# EAGLE board openSX70-dongle. (EAGLE 8.4.3)
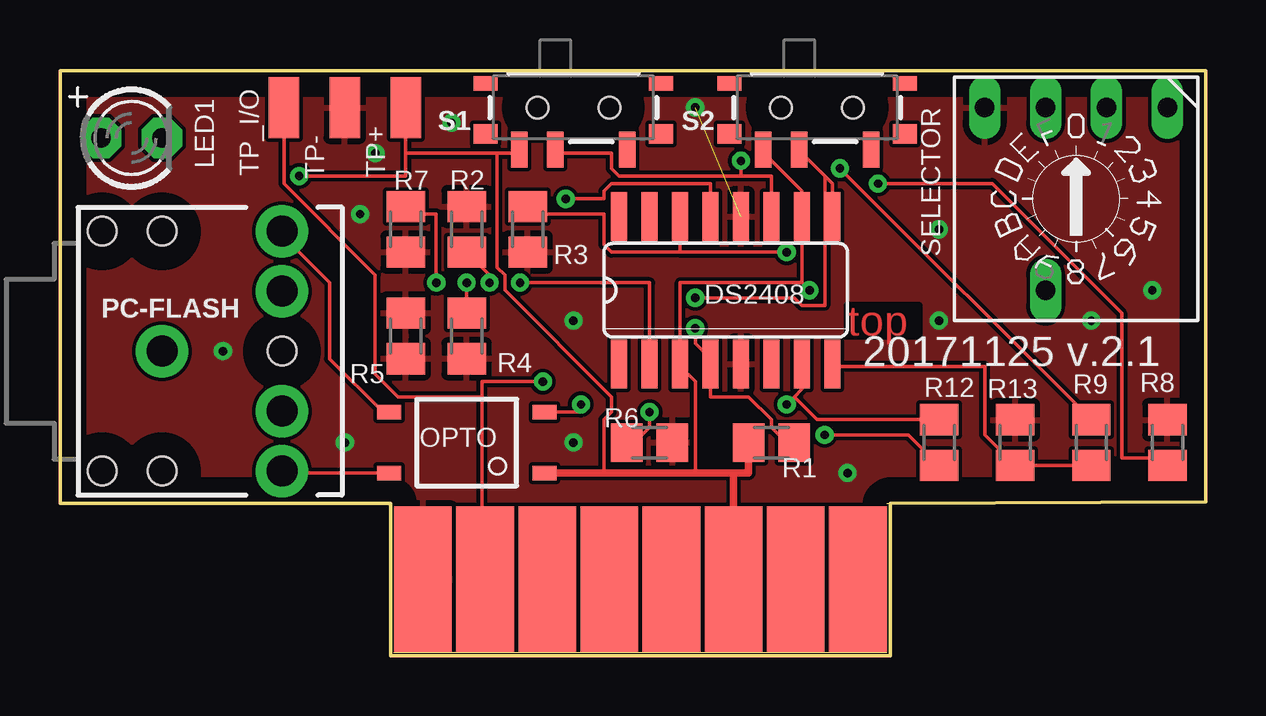
[diagram p0: board, top side]
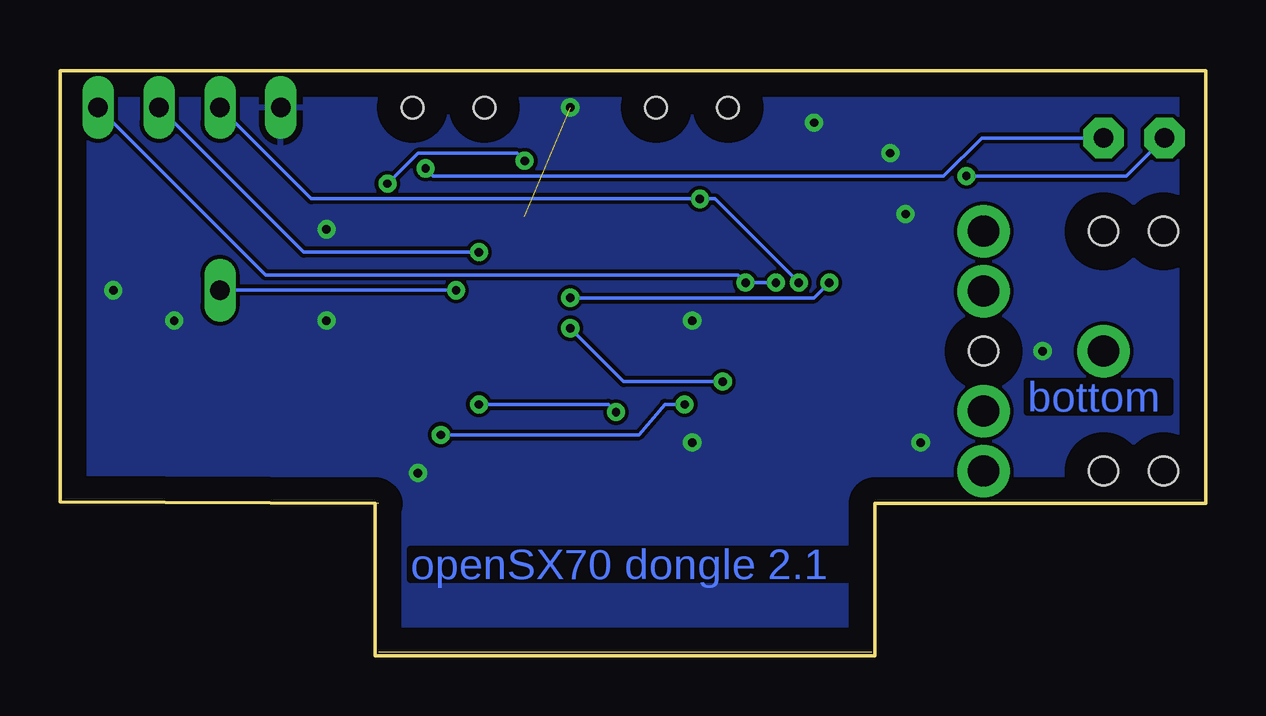
[diagram p1: board, bottom side, seen from below]

Size 47.75 x 24.38 mm. Coordinates in mm from the lower left corner, seen from the top.
Outline: 13.9,0.14 34.48,0.14
Outline: 34.48,6.35 34.61,6.35
Outline: 34.61,6.35 34.61,0 13.78,0 13.78,6.35 0,6.35 0,24.38 47.75,24.38 47.75,6.41 34.61,6.35
Copper layers (1*16): Top 0.035mm / dielectric 1.5mm / Bottom 0.035mm
Design rules "default": minimum track width 6mil, minimum drill 0.35mm, track to track 6mil, track to pad 6mil, pad to pad 6mil, via to via 6mil, smd to smd 6mil, copper to edge 40mil, drill to drill 6mil, minimum pad ring 10mil, minimum via ring 8mil, stop-mask expansion 4mil, vias tented up to drill 0mil, thermal gap 10mil

## Footprints (pad centres in the part's own frame; a part is rotated, then mirrored left to right if it is on the bottom)
SO16 = smd 0.66 x 2.032: 1 -4.445,-3.073; 2 -3.175,-3.073; 3 -1.905,-3.073; 4 -0.635,-3.073; 5 0.635,-3.073; 6 1.905,-3.073; 7 3.175,-3.073; 8 4.445,-3.073; 9 4.445,3.073; 10 3.175,3.073; 11 1.905,3.073; 12 0.635,3.073; 13 -0.635,3.073; 14 -1.905,3.073; 15 -3.175,3.073; 16 -4.445,3.073
LED3MM = drill 0.813 pad 1.676 octagon: A -1.27,0; K 1.27,0
SO-4 = smd 1 x 0.6: 1 -3.24,0.635; 2 -3.24,-1.905; 3 3.24,-1.905; 4 3.24,0.635
AUDIO-JACK = drill 1.3 pad 2.184: RING 5,5; RSH 5,2.5; SLEEVE 0,0; TIP 5,-5; TSH 5,-2.5 | hole 1.2: 0,5; -2.5,5; -2.5,-5; 0,-5; 5,0
M0805 = smd 1.3 x 1.6: 1 -0.95,0; 2 0.95,0
SWITCH_SPST_SMD_A = smd 0.7 x 1.5: 1 -2.25,-1.75; 2 -0.75,-1.75; 3 2.25,-1.75 | smd 1 x 0.6: GND1 -3.65,1; GND3 3.65,1 | smd 1 x 0.8: GND2 -3.65,-1.1; GND4 3.65,-1.1 | hole 0.9: -1.5,0; 1.5,0
SW-C16 = drill 0.813 long: 1 -3.81,-3.81; 2 -1.27,-3.81; 4 1.27,-3.81; 8 3.81,-3.81; C 1.27,3.81
SMD1,27-2,54 = smd 1.27 x 2.54: 1 0,0
FLASH-EDGE-8 = smd 2.4 x 6.09: P$1 -9.065,0; P$2 -6.475,0; P$3 -3.885,0; P$4 -1.295,0; P$5 1.295,0; P$6 3.885,0; P$7 6.475,0; P$8 9.065,0

## Placement (x,y rotation side)
DS2408  DS2408  [SO16]  27.75,15.24 0 top
LED1  [LED3MM]  2.98,21.59 0 top
OPTO  TLP127  [SO-4]  16.95,8.26 180 top
PC-FLASH  AUDIO_JACK_3.5MM_PTH  [AUDIO-JACK]  4.25,12.7 0 top
R1  4K7  [M0805]  29.65,8.89 180 top
R2  100K  [M0805]  16.95,17.78 90 top
R3  100K  [M0805]  19.49,17.78 90 top
R4  100K  [M0805]  16.95,13.34 90 top
R5  100K  [M0805]  14.41,13.34 270 top
R6  100K  [M0805]  24.57,8.89 0 top
R7  100K  [M0805]  14.41,17.78 270 top
R8  100K  [M0805]  46.16,8.89 90 top
R9  220R  [M0805]  42.99,8.89 90 top
R12  220R  [M0805]  36.64,8.89 270 top
R13  100K  [M0805]  39.81,8.89 90 top
S1  [SWITCH_SPST_SMD_A]  21.4,22.86 0 top
S2  [SWITCH_SPST_SMD_A]  31.56,22.86 0 top
SELECTOR  [SW-C16]  42.35,19.05 180 top
TP+  [SMD1,27-2,54]  14.41,22.86 0 top
TP-  [SMD1,27-2,54]  11.87,22.86 0 top
TP_I/O  [SMD1,27-2,54]  9.33,22.86 0 top
U$1  FLASH-EDGE-CONNECTOR  [FLASH-EDGE-8]  24.19,3.18 0 top

## Library data of the parts
DS2408 = DS2408-joaco
LED1 = adafruit
OPTO = openSX70
PC-FLASH = SparkFun-Connectors; PROD_ID: CONN-08774; SF_ID: PRT-08032
R1-R9 R12 R13 = rcl
S1 S2 = SparkFun-Switches; PROD_ID: SWCH-10651; SF_SKU: COM-10860
SELECTOR = special
TP+ TP- TP_I/O = wirepad
U$1 = SX70-flash

## Nets
GND: DS2408.5 DS2408.12 R2.2 R3.1 R4.1 R5.1 R5.2 R6.2 R7.2 R8.2 R13.2 SELECTOR.8 TP-.1 U$1.P$1
N$1: DS2408.4 R1.1 TP_I/O.1 U$1.P$2
N$2: LED1.K R9.2
N$3: DS2408.2 R2.1 SELECTOR.1
N$4: DS2408.14 R3.2 SELECTOR.2
N$5: DS2408.13 R4.2 SELECTOR.4
N$6: DS2408.11 R8.1 S1.2
N$7: DS2408.9 R7.1 S2.2
N$8: DS2408.8 R9.1 R13.1
N$10: OPTO.2 R12.2
N$11: DS2408.7 R6.1 R12.1
N$12: OPTO.4 PC-FLASH.TIP
N$15: OPTO.3 PC-FLASH.RING
VCC: DS2408.3 DS2408.10 LED1.A OPTO.1 R1.2 S1.1 S2.1 SELECTOR.C TP+.1 U$1.P$6

## Tracks (layer width: path | path; a pad name or v marks a point on that pad's centre or on a via)
GND  (via drill 0.35)  (1 unrouted)
  other vias: 6.79,12.7 45.53,15.24 42.99,13.97 36.64,13.97 32.83,7.62 21.4,8.89 11.87,8.89 26.48,22.86 12.51,18.41 13.14,20.96 16.32,22.23 21.4,13.97 36.64,17.78
  pour Bottom (isolate 0.152): -0.19,24.77 -0.19,6.35 13.78,6.35 13.78,0 34.73,0 34.73,6.35 48.07,6.35 48.07,24.77
  pour Top (isolate 0.152): -0.19,24.77 -0.19,6.35 13.78,6.35 13.78,0 34.73,0 34.73,6.35 48.07,6.35 48.07,24.77
N$1  (via drill 0.35)
  Top 0.152: R1.1 30.29,8.89 29.65,9.53 29.65,9.84 28.7,10.79 27.11,10.79 DS2408.4 27.11,12.38 26.48,13.02 v26.48,13.65 | TP_I/O.1 9.33,19.68 13.14,15.88 13.14,11.75 14.1,10.79 17.59,10.79 | 17.59,10.79 17.59,3.18 U$1.P$2 | v20.13,11.43 17.59,11.43 17.59,10.79
  Bottom 0.152: v26.48,13.65 24.26,11.43 v20.13,11.43
N$2  (via drill 0.35)
  Top 0.152: v32.51,20.32 R9.2
  Bottom 0.152: v32.51,20.32 32.19,20 10.92,20 9.33,21.59 LED1.K
N$3  (via drill 0.35)
  Top 0.152: v17.91,15.56 17.91,15.88 R2.1 | v19.18,15.56 24.57,15.56 DS2408.2
  Bottom 0.152: v17.91,15.56 v19.18,15.56 19.49,15.88 39.18,15.88 SELECTOR.1
N$4  (via drill 0.35)
  Top 0.152: 25.84,16.83 22.99,16.83 22.67,17.14 22.67,18.41 19.49,18.41 R3.2 | DS2408.14 25.84,16.83 | 25.84,16.83 v30.29,16.83
  Bottom 0.152: SELECTOR.2 37.59,16.83 v30.29,16.83
N$5  (via drill 0.35)
  Top 0.152: v16.95,15.56 R4.2 | v21.08,19.05 22.67,19.05 22.67,19.37 22.99,19.68 27.11,19.68 DS2408.13
  Bottom 0.152: v16.95,15.56 20.45,19.05 v21.08,19.05 37.27,19.05 SELECTOR.4
N$6  (via drill 0.35)
  Top 0.152: 28.38,20 29.65,20 DS2408.11 | 28.38,20 23.3,20 22.99,20.32 22.99,20.96 20.76,20.96 S1.2 | v34.1,19.68 38.86,19.68 44.26,14.29 44.26,8.26 46.16,8.26 R8.1 | 28.38,20 v28.38,20.64
  Bottom 0.152: v34.1,19.68 32.83,20.96 28.7,20.96 v28.38,20.64
N$7  (via drill 0.35)
  Top 0.152: 31.88,20 32.19,19.68 DS2408.9 | 31.88,20 30.92,20.96 S2.2 | v15.68,15.56 15.68,18.41 14.41,18.41 R7.1 | v26.48,14.92 30.61,14.92 30.92,14.61 31.88,14.61 31.88,20
  Bottom 0.152: v15.68,15.56 16.32,14.92 v26.48,14.92
N$8
  Top 0.152: R13.1 R9.1 | R13.1 38.54,9.21 38.54,12.07 32.19,12.07 DS2408.8 | R13.1
N$10  (via drill 0.35)
  Top 0.152: OPTO.2 21.72,10.16 v21.72,10.48 | v31.88,9.21 35.37,9.21 R12.2
  Bottom 0.152: v21.72,10.48 22.54,10.48 23.62,9.21 v31.88,9.21
N$11  (via drill 0.35)
  Top 0.152: v24.57,10.16 24.57,9.53 23.94,8.89 R6.1 | 30.61,10.79 30.92,11.11 DS2408.7 | 30.61,10.79 v30.29,10.48 | 30.61,10.79 31.56,9.84 R12.1
  Bottom 0.152: v24.57,10.16 24.89,10.48 v30.29,10.48
N$12
  Top 0.152: OPTO.4 9.33,7.62 PC-FLASH.TIP
N$15
  Top 0.152: OPTO.3 13.46,10.16 11.24,12.38 11.24,15.56 9.33,17.46 PC-FLASH.RING
VCC  (via drill 0.35)
  Top 0.152: 14.41,20.96 18.22,20.96 | 18.22,20.96 18.86,20.96 S1.1 | TP+.1 14.41,20.96 | v9.97,20 14.41,20 14.41,20.96 | S2.1 29.34,20.96 30.92,19.37 DS2408.10 30.92,15.56 | 30.92,15.56 v31.24,15.24 | R1.2 | 26.48,7.62 26.48,11.43 25.84,12.07 DS2408.3 25.84,15.56 30.92,15.56 | 28.07,3.18 U$1.P$6 | 18.22,20.96 18.22,16.19 18.54,15.88 18.54,15.24 22.99,10.79 22.99,10.16 22.67,9.84 22.67,7.62
  Top 0.305: 28.07,7.62 28.7,7.62 R1.2 | 28.07,7.62 26.48,7.62 22.67,7.62 OPTO.1 | 28.07,3.18 28.07,7.62
  Bottom 0.152: LED1.A 3.3,20 v9.97,20 | v31.24,15.24 SELECTOR.C

## Text on the board
Top: top
Bottom: bottom | openSX70 dongle 2.1
tPlace: 20171125 v.2.1